# Altium PCB ALCT_MEZ_LX150T.PcbDoc (part 2 of 9)
Units mil, origin at the board's own origin, x right, y up, seen from the top; angles counter-clockwise.
Board outline 4101.98 x 5875.01 mil, 12 copper layers (Top Layer, Mid-Layer 1, +3V3, Mid-Layer 2, +1V2, Mid-Layer 4, +2V5, Mid-Layer 5, GND1, Mid-Layer 7, GND2, Bottom Layer), stack 64.7 mil thick; 378 components, 616 nets, 2492 pads, 1686 vias.
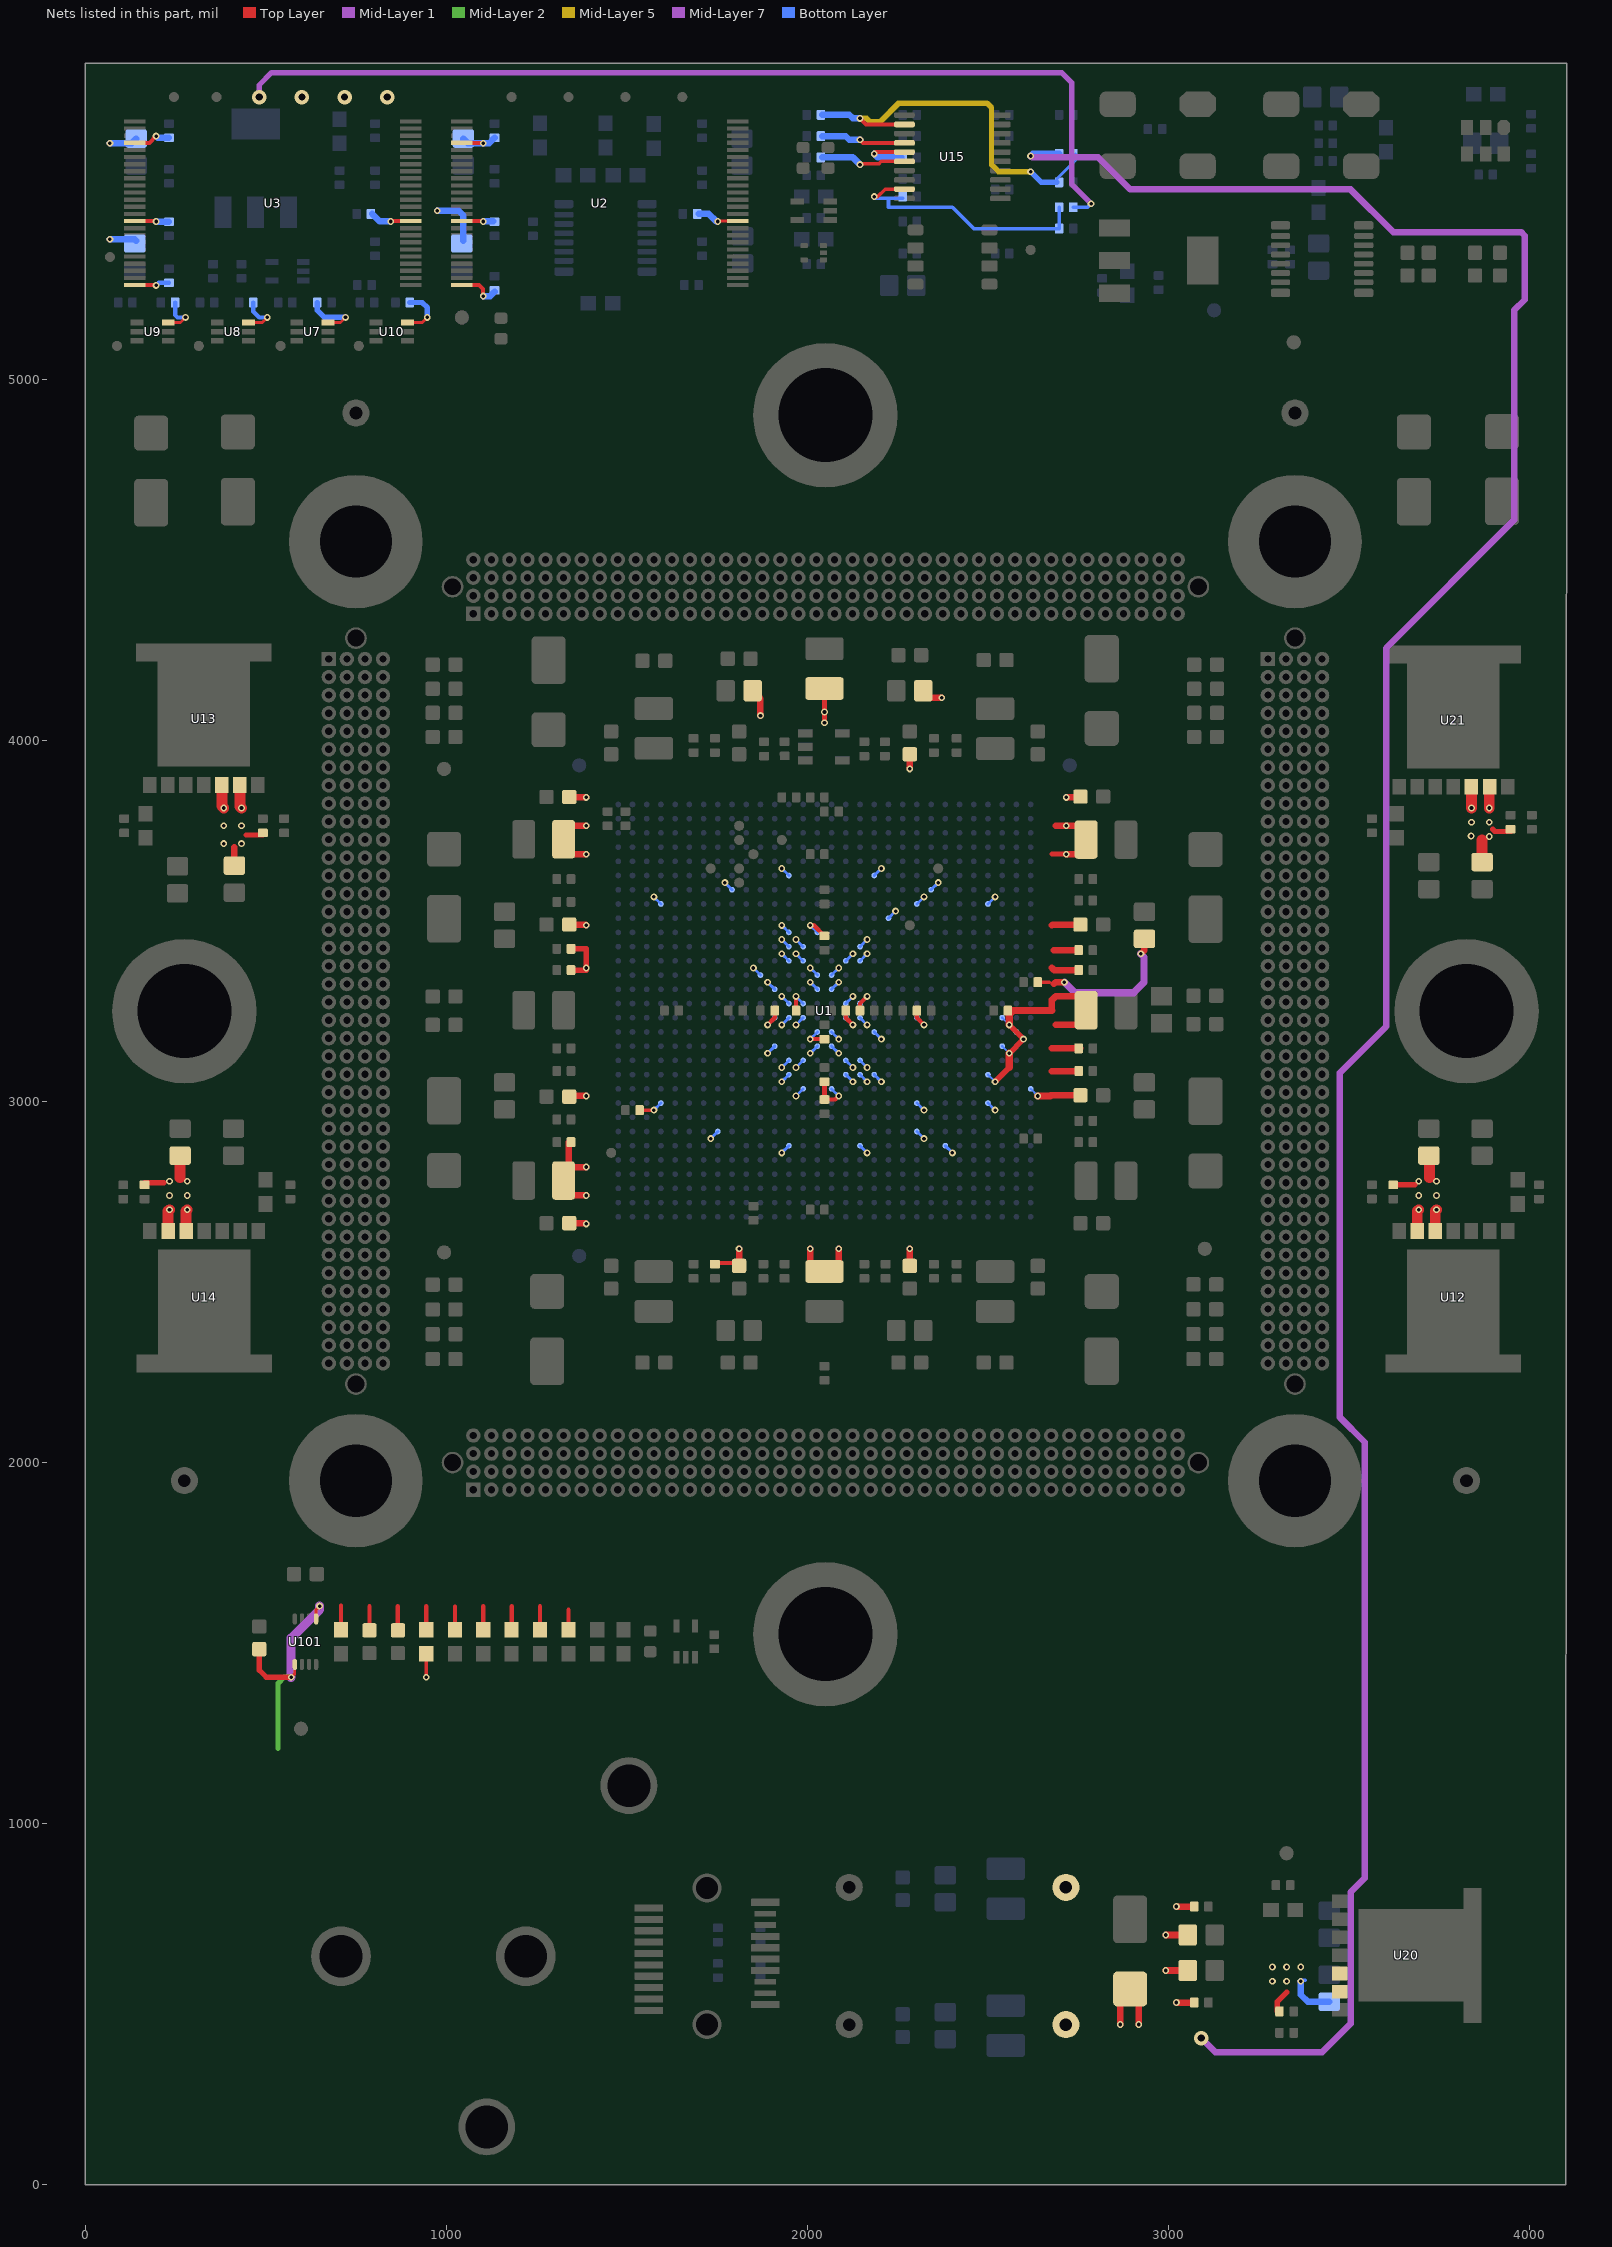
[diagram p12: the nets of this part, all layers, seen from the top]

## Footprints (in the part's own frame and the unit in brackets; to place one, negate y for a bottom-side part, rotate by r counter-clockwise, add the part's x,y. Pads: shape width x height; smd on the part's side, far side on the other; paste and mask are expansions set on the pad) (continued)
MC_S6/SM/SOT_553_DRL5 [mm] "http://www.ti.com/lit/ml/mpds158c/mpds158c.pdf"
  rrect25% 0.5x0.35 smd: 1(-0.675,0.5) 2(-0.675,0) 3(-0.675,-0.5) 4(0.675,-0.5) 5(0.675,0.5)
  Top Layer pour cut-out: 0.2,-0.9 1.1,-0.9 1.1,-0.1 0.2,-0.1
  Top Layer pour cut-out: 0.2,0 1.1,0 1.1,0.9 0.2,0.9
  Top Layer pour cut-out: -1.1,-0.9 0.2,-0.9 0.2,0.9 -1.1,0.9
  silkscreen extent -0.81,-0.75 0.18,1.31, body extent -0.77,-0.85 0.78,0.85, height 0.6
MC_S6/SM/SOT_SC70_DCK5 [mm]
  rect 0.9x0.4 smd: 1(-1.1,0.65) 2(-1.1,0) 3(-1.1,-0.65) 4(1.1,-0.65) 5(1.1,0.65)
  Top Layer pour cut-out: 0.4,-1.05 1.8,-1.05 1.8,-0.25 0.4,-0.25
  Top Layer pour cut-out: 0.4,0.25 1.8,0.25 1.8,1.05 0.4,1.05
  Top Layer pour cut-out: -1.8,-1.05 -0.4,-1.05 -0.4,1.05 -1.8,1.05
  silkscreen extent -1.46,-0.95 0.3,1.6
MC_S6/SM/SOT_SC70_DCK6 [mm]
  rect 0.9x0.4 smd: 1(-1.1,0.65) 2(-1.1,0) 3(-1.1,-0.65) 4(1.1,-0.65) 5(1.1,0) 6(1.1,0.65)
  Top Layer pour cut-out: -1.8,-1.05 -0.4,-1.05 -0.4,1.05 -1.8,1.05
  Top Layer pour cut-out: 0.4,-1.05 1.8,-1.05 1.8,1.05 0.4,1.05
  silkscreen extent -1.42,-0.95 0.3,1.57, body extent -1.05,-1 1.05,1, height 1
MC_S6/SM/SPAK7 [mm]
  rect 1.1x0.95 smd: 1(-4.71,3.81) 2(-4.71,2.54) 3(-4.71,1.27) 4(-4.71,0) 5(-4.71,-1.27) 6(-4.71,-2.54) 7(-4.71,-3.81)
  rect 8.03x6.5 smd paste-10.516: 8(0.6,0)
  rect 1.27x9.52 smd paste-10.516: 8(4.6,0)
  Top Layer pour cut-out: -5.51,-4.59 -3.81,-4.59 -3.81,4.51 -5.51,4.51
  silkscreen extent -5.42,4.81 -5,5.23, body extent -5.19,-4.76 5.27,4.76, height 1.96
MC_S6/SM/TE-1888247-1 [mm]
  rrect10% 2x0.5 smd: 1(-4.1,3.4) 2(-4.1,2.6) 3(-4.1,1.8) 4(-4.1,1) 5(-4.1,0.2) 6(-4.1,-0.6) 7(-4.1,-1.4) 8(-4.1,-2.2) 9(-4.1,-3) 10(-4.1,-3.8) 11(4.1,-3.4) 14(4.1,-1) 15(4.1,-0.2) 16(4.1,0.6) 17(4.1,1.4) 20(4.1,3.8)
  rrect10% 1.5x0.4 smd: 12(4.1,-2.6) 13(4.1,-1.8) 18(4.1,2.2) 19(4.1,3)
  round 2.032 hole 1.55: 21(0,-4.8) 21(0,4.8)
  Top Layer pour cut-out: -5.5,6 -5.5,-6 5.5,-6 5.5,6
  body extent -4.5,-5.5 4.5,5.5, height 5.35
MC_S6/SM/TSSOP16 [mm]
  rrect50% 1.35x0.6 smd: 1(-2.925,2.475) 8(-2.925,-2.275) 9(2.925,-2.275) 16(2.925,2.475)
  rrect50% 1.35x0.4 smd: 2(-2.925,1.725) 3(-2.925,1.075) 4(-2.925,0.425) 5(-2.925,-0.225) 6(-2.925,-0.875) 7(-2.925,-1.525) 10(2.925,-1.525) 11(2.925,-0.875) 12(2.925,-0.225) 13(2.925,0.425) 14(2.925,1.075) 15(2.925,1.725)
  Top Layer pour cut-out: -1.725,-2.925 -1.725,3.075 -4.025,3.075 -4.025,-2.925
  Top Layer pour cut-out: 3.975,-2.925 3.975,3.075 1.675,3.075 1.675,-2.925
  silkscreen extent -3.15,-2.43 1.68,3.5, body extent -3.2,-2.45 3.2,2.65, height 1.1
MC_S6/SM/VOG48 [mm]
  rect 1.5x0.3 smd: 1(-9.7,5.75) 2(-9.7,5.25) 3(-9.7,4.75) 4(-9.7,4.25) 5(-9.7,3.75) 6(-9.7,3.25) 7(-9.7,2.75) 8(-9.7,2.25) 9(-9.7,1.75) 10(-9.7,1.25) 11(-9.7,0.75) 12(-9.7,0.25) 13(-9.7,-0.25) 14(-9.7,-0.75) 15(-9.7,-1.25) 16(-9.7,-1.75) 17(-9.7,-2.25) 18(-9.7,-2.75) 19(-9.7,-3.25) 20(-9.7,-3.75) 21(-9.7,-4.25) 22(-9.7,-4.75) 23(-9.7,-5.25) 24(-9.7,-5.75) 25(9.7,-5.75) 26(9.7,-5.25) 27(9.7,-4.75) 28(9.7,-4.25) 29(9.7,-3.75) 30(9.7,-3.25) 31(9.7,-2.75) 32(9.7,-2.25) 33(9.7,-1.75) 34(9.7,-1.25) 35(9.7,-0.75) 36(9.7,-0.25) 37(9.7,0.25) 38(9.7,0.75) 39(9.7,1.25) 40(9.7,1.75) 41(9.7,2.25) 42(9.7,2.75) 43(9.7,3.25) 44(9.7,3.75) 45(9.7,4.25) 46(9.7,4.75) 47(9.7,5.25) 48(9.7,5.75)
  Top Layer pour cut-out: 10.8,-6.25 10.8,6.25 8.5,6.25 8.5,-6.25
  Top Layer pour cut-out: -8.5,-6.25 -8.5,6.25 -10.8,6.25 -10.8,-6.25
  silkscreen extent -9.92,-6 8.3,6.87, body extent -10,-6.05 10.1,6.05, height 1.26
MC_S6/SM/XTAL-7X5.08 [mm]
  oct 2.54x1.803 smd: 1(-2.75,-2.25)
  rrect50% 2.54x1.803 smd: 2(2.875,-2.25) 3(2.875,2.125) 4(-2.75,2.125)
  silkscreen extent -4.75,-3.75 3.85,2.83, body extent -3.5,-2.54 3.5,2.54, height 1.9
MC_S6/SM/XTAL-LVDS-3.2-2.5 [mm] "SMD Oscillator, 3.2x2.5 mm"
  oct 1.05x0.86 smd: 1(-0.925,1.29)
  rrect10% 1.05x0.82 smd: 2(-0.925,0.02) 5(0.925,0.02)
  rrect10% 1.05x0.86 smd: 3(-0.925,-1.29) 4(0.925,-1.29) 6(0.925,1.29)
  Top Layer pour cut-out: -1.8,-2.1 1.8,-2.1 1.8,2.2 -1.4,2.2 -1.8,1.8
  silkscreen extent -1.88,2.12 -1.62,2.38, body extent -1.25,-1.6 1.25,1.6, height 1.05
MC_S6/SPLATE [mil]
  silkscreen extent 550,582 3550,3407, body extent 0,0 4100,3950, height 188
MC_S6/TH/DELEVAN1537 [mil]
  round 75 hole 35: 1(-300,0) 2(300,0)
  silkscreen extent -240,-80 240,80, body extent -187,-77 188,78, height 156
MC_S6/TH/SAMTEC_MOLC_40X4 [mil]
  rect 32x32.01 / inner rect 32x32.01 / far side rect 40x40 hole 20: A1(0,0)
  oval 32x32.01 / inner oval 32x32.01 / far side round 40 hole 20: A2(50,0) A3(100,0) A4(150,0) A5(200,0) A6(250,0) A7(300,0) A8(350,0) A9(400,0) A10(450,0) A11(500,0) A12(550,0) A13(600,0) A14(650,0) A15(700,0) A16(750,0) A17(800,0) A18(850,0) A19(900,0) A20(950,0) A21(1000,0) A22(1050,0) A23(1100,0) A24(1150,0) A25(1200,0) A26(1250,0) A27(1300,0) A28(1350,0) A29(1400,0) A30(1450,0) A31(1500,0) A32(1550,0) A33(1600,0) A34(1650,0) A35(1700,0) A36(1750,0) A37(1800,0) A38(1850,0) A39(1900,0) A40(1950,0) B1(0,-50) B2(50,-50) B3(100,-50) B4(150,-50) B5(200,-50) B6(250,-50) B7(300,-50) B8(350,-50) B9(400,-50) B10(450,-50) B11(500,-50) B12(550,-50) B13(600,-50) B14(650,-50) B15(700,-50) B16(750,-50) B17(800,-50) B18(850,-50) B19(900,-50) B20(950,-50) B21(1000,-50) B22(1050,-50) B23(1100,-50) B24(1150,-50) B25(1200,-50) B26(1250,-50) B27(1300,-50) B28(1350,-50) B29(1400,-50) B30(1450,-50) B31(1500,-50) B32(1550,-50) B33(1600,-50) B34(1650,-50) B35(1700,-50) B36(1750,-50) B37(1800,-50) B38(1850,-50) B39(1900,-50) B40(1950,-50) C1(0,-100) C2(50,-100) C3(100,-100) C4(150,-100) C5(200,-100) C6(250,-100) C7(300,-100) C8(350,-100) C9(400,-100) C10(450,-100) C11(500,-100) C12(550,-100) C13(600,-100) C14(650,-100) C15(700,-100) C16(750,-100) C17(800,-100) C18(850,-100) C19(900,-100) C20(950,-100) C21(1000,-100) C22(1050,-100) C23(1100,-100) C24(1150,-100) C25(1200,-100) C26(1250,-100) C27(1300,-100) C28(1350,-100) C29(1400,-100) C30(1450,-100) C31(1500,-100) C32(1550,-100) C33(1600,-100) C34(1650,-100) C35(1700,-100) C36(1750,-100) C37(1800,-100) C38(1850,-100) C39(1900,-100) C40(1950,-100) D1(0,-150) D2(50,-150) D3(100,-150) D4(150,-150) D5(200,-150) D6(250,-150) D7(300,-150) D8(350,-150) D9(400,-150) D10(450,-150) D11(500,-150) D12(550,-150) D13(600,-150) D14(650,-150) D15(700,-150) D16(750,-150) D17(800,-150) D18(850,-150) D19(900,-150) D20(950,-150) D21(1000,-150) D22(1050,-150) D23(1100,-150) D24(1150,-150) D25(1200,-150) D26(1250,-150) D27(1300,-150) D28(1350,-150) D29(1400,-150) D30(1450,-150) D31(1500,-150) D32(1550,-150) D33(1600,-150) D34(1650,-150) D35(1700,-150) D36(1750,-150) D37(1800,-150) D38(1850,-150) D39(1900,-150) D40(1950,-150)
  round 60 hole 47: MC1(-57.5,-75) MC2(2007.5,-75)
  silkscreen extent -75,-235 2025,85, body extent -75,-234 2025,86, height 224
MC_S6/TH/SCREW_BASE [mil]
  round 400 / inner round 340 / far side round 340 hole 260: 1(0,0)
MC_S6/TH/SCREW_PLATE [mil]
  round 370 / inner round 280 / far side round 280 hole 200: 1(0,0)
MC_S6/TH/TIE_VIA [mil]
  round 20 on Mid7: 1(0,0) 2(0,50)
  Mid-Layer 7 region: -9.97,-10 10.03,-10 10.03,60 -9.97,60
MC_S6/TH/TPGND [mil]
  round 75 hole 35: 1(0,0)
  silkscreen extent -80,-85 80,45
MC_S6/TH/TPVIA [mil]
  round 28 smd paste-39.37: 1(0,0)
"PCBM_CERN_VTTX V2.1" [mm] "Versatile Twin Transmitter Module"
  round 4.2 hole 3: 1(-25.74,0) 2(-12.74,0)
  body extent -52.1,-7.25 1.8,7.25, height 11.71
SOT353-1 [mm] "SOT23, 5-Leads, Body 2.05x2.25mm, Pitch 0.65mm, IPC Medium Density"
  rect 0.95x0.4 smd: 1(-1.15,0.65) 2(-1.15,0) 3(-1.15,-0.65) 4(1.15,-0.65) 5(1.15,0.65)
  silkscreen extent -1.28,-1.15 0.3,1.52, body extent -0.67,-1.12 0.67,1.13, height 1.1
"VSSOP8 SOT765-1" [mm] "TSSOP, 8-Leads, Body 2.00x2.30mm, Pitch 0.50mm, IPC Medium Density"
  oval 0.8x0.3 smd: 1(-1.6,0.75) 2(-1.6,0.25) 3(-1.6,-0.25) 4(-1.6,-0.75) 5(1.6,-0.75) 6(1.6,-0.25) 7(1.6,0.25) 8(1.6,0.75)
  silkscreen extent -1.72,-1.05 0.8,1.57, body extent -1.55,-1.05 1.55,1.05, height 1

## Part data
1V2_INT 1V2_MGT 1V8 2V5_AUX 2V5_SFP 3V3 AWAKE BUSY CCLK CMPCSB CSB CSOB DONE DSN INIT INITB PROGB TCK TDI TDO TDOF TDOP TMS TTCCLK VCORE VREF WRITEB: library part TPVIA, Package=90, COMPGROUP=0, COMPROT=0, COMPSIDE=TOP, mfgr=Layout, mfgr_foot=TPVIA, mfgr_id=TPVIA
C1 C2 C9 C10 C88 C89 C107 C120 C121 C122 C123 C124 C125 C126 C127 C128 C129 C130 C131 C132 C134 C135 C136 C137 C138 C139 C140 C141 C142 C143 C144 C301 C311 C321 C331 C341 C351 C361 C362 C363 C364 C371 C372 C373 C374: library part GRM188R6YA475KE15D, "CAP CER 4.7UF 35V X5R 0603", Capacitance=4.7µF, Manufacturer=Murata, Operating Temperature="-55°C ~ 85°C", Package=0603, Package / Case="0603 (1608 Metric)", Standard Package=4,000, Supplier Part Number 1=490-7205-1-ND, Temperature Coefficient=X5R, Tolerance=±10%, Voltage - Rated=35V, Applications="General Purpose", Category=Capacitors, ComponentLink1Description=https://datasheet.ciiva.com/46444/1769893-46444984.pdf, ComponentLink1URL=https://datasheet.ciiva.com/46444/1769893-46444984.pdf, ComponentLink2Description=https://datasheet.ciiva.com/46444/1769893-46444985.pdf, ComponentLink2URL=https://datasheet.ciiva.com/46444/1769893-46444985.pdf, ComponentLink3Description=https://datasheet.ciiva.com/14906/partnumbering-e-01-14906426.pdf, ComponentLink3URL=https://datasheet.ciiva.com/14906/partnumbering-e-01-14906426.pdf, ComponentLink4Description=https://datasheet.ciiva.com/14906/partnumbering-e-01-14906427.pdf, ComponentLink4URL=https://datasheet.ciiva.com/14906/partnumbering-e-01-14906427.pdf, ComponentLink5Description=https://datasheet.ciiva.com/14906/partnumbering-e-01-14906428.pdf, ComponentLink5URL=https://datasheet.ciiva.com/14906/partnumbering-e-01-14906428.pdf, EDA / CAD Models="Download from Accelerated Designs", Family="Ceramic Capacitors", Featured Product="GA3 Safety Recognized Capacitors", Manufacturer Part Number=GRM188R6YA475KE15D, Mounting Type="Surface Mount, MLCC", Online Catalog="GRM Series", Other Names=490-7205-2, Packaging="Tape & Reel (TR)", Pricing 1="1=0.32, 10=0.264, 50=0.1486, 100=0.132, 250=0.099, 500=0.0875, 1000=0.0776 (USD)", Pricing 2="1=0.32, 10=0.264, 50=0.1486, 100=0.132, 250=0.099, 500=0.0875, 1000=0.0776 (USD)", Product Training Modules="High-Cap Multilayer Ceramic Capacitors", Series=GRM, Size / Dimension="0.063\" L x 0.031\" W (1.60mm x 0.80mm)", Stock 1=180441, Stock 2=180441, Supplier 1=Digikey, Supplier 2=Digikey, Supplier Part Number 2=490-7205-6-ND, Thickness (Max)="0.031\" (0.80mm)"
C3 C4 C6 C7 C11 C12 C14 C15 C17 C18 C29 C54 C58 C60 C65 C69 C71 C82 C90 C99 C100 C103 C110 C113 C146 C302 C312 C322 C332 C342 C365 C375: library part GRM21BR61E106KA73L, "CAP CER 10UF 25V X5R 0805", Capacitance=10µF, Manufacturer="Murata Electronics North America", Operating Temperature="-55°C ~ 85°C", Package=0805, Package / Case="0805 (2012 Metric)", Ratings=-, Supplier Part Number 1=490-5523-1-ND, Temperature Coefficient=X5R, Tolerance=±10%, Voltage - Rated=25V, Applications="General Purpose", Category=Capacitors, ComponentLink1Description=http://www.murata.com/~/media/webrenewal/support/library/catalog/products/capacitor/mlcc/c02e.pdf, ComponentLink1URL=http://www.murata.com/~/media/webrenewal/support/library/catalog/products/capacitor/mlcc/c02e.pdf, Features=-, Height - Seated (Max)=-, Lead Spacing=-, Lead Style=-, Manufacturer Part Number=GRM21BR61E106KA73L, Mounting Type="Surface Mount, MLCC", Packaging="Cut Tape (CT)", Part Status=Active, Pricing 1="1=0.19, 10=0.13, 50=0.0748, 100=0.0618, 250=0.052, 500=0.04356, 1000=0.03575 (USD)", RoHS="RoHS Compliant", Size / Dimension="0.079\" L x 0.049\" W (2.00mm x 1.25mm)", Stock 1=607428, Supplier 1=Digi-Key, Supplier 2=Digi-Key, Supplier Part Number 2=490-5523-6-ND, Thickness (Max)="0.053\" (1.35mm)"
C5 C8 C13 C16 C19 C26 C27 C84 C85 C106 C116 C133 C145 C148: library part C0402C103K4RACTU, "CAP CER 10nF 16V X7R 0402", Capacitance=10000pF, Manufacturer=KEMET, Operating Temperature="-55°C ~ 125°C", Package=0402, Package / Case="0402 (1005 Metric)", Ratings=-, Supplier Part Number 1=399-1038-1-ND, Temperature Coefficient=X7R, Tolerance=±10%, Voltage - Rated=16V, Applications="General Purpose", Category=Capacitors, ComponentLink1Description=http://www.kemet.com/docfinder?Partnumber=C0402C103K4RACTU, ComponentLink1URL=http://www.kemet.com/docfinder?Partnumber=C0402C103K4RACTU, Failure Rate=-, Features=-, Height - Seated (Max)=-, Lead Spacing=-, Lead Style=-, Manufacturer Part Number=C0402C103K4RACTU, Mounting Type="Surface Mount, MLCC", Packaging="Cut Tape (CT)", Part Status=Active, Pricing 1="1=0.1, 10=0.02, 25=0.0144, 50=0.0108, 100=0.0088, 250=0.00732, 500=0.00626, 1000=0.00492, 5000=0.00412 (USD)", Pricing 2="1=0.1, 10=0.02, 25=0.0144, 50=0.0108, 100=0.0088, 250=0.00732, 500=0.00626, 1000=0.00492, 5000=0.00412 (USD)", RoHS="RoHS Compliant", Size / Dimension="0.039\" L x 0.020\" W (1.00mm x 0.50mm)", Stock 1=605739, Stock 2=605739, Supplier 1=Digi-Key, Supplier 2=Digi-Key, Supplier Part Number 2=399-1038-6-ND, Thickness (Max)="0.022\" (0.55mm)"
C20 C21 C22 C23 C24 C25 C33 C40 C41 C42 C43 C44 C45 C46 C47 C78 C83 C101 C111 C119 C147 C201 C202 C203 C204 C205 C211 C212 C213 C214 C215 C221 C222 C223 C224 C225 C231 C232 C233 C234 C235 C241 C242 C243 C244 C251 C252 C253 C254 C261 C262 C263 C264 C265 C266 C267 C268 C271 C272 C273 C274 C275 C276: library part GRM155R61A474KE15J, "CAP CER 0.47UF 10V X5R 0402", Capacitance=0.47µF, Manufacturer="Murata Electronics North America", Operating Temperature="-55°C ~ 85°C", Package=0402, Package / Case="0402 (1005 Metric)", Ratings=-, Supplier Part Number 1=490-6305-1-ND, Temperature Coefficient=X5R, Tolerance=±10%, Voltage - Rated=10V, Applications="General Purpose", Category=Capacitors, ComponentLink1Description=http://www.murata.com/~/media/webrenewal/support/library/catalog/products/capacitor/mlcc/c02e.ashx, ComponentLink1URL=http://www.murata.com/~/media/webrenewal/support/library/catalog/products/capacitor/mlcc/c02e.ashx, Features=-, Height - Seated (Max)=-, Lead Spacing=-, Manufacturer Part Number=GRM155R61A474KE15J, Mounting Type="Surface Mount, MLCC", Packaging="Cut Tape (CT)", Part Status=Active, Pricing 1="1=0.1, 10=0.074, 100=0.0329, 500=0.02348, 1000=0.01845, 2500=0.01678, 5000=0.01543 (USD)", Pricing 2="1=0.1, 10=0.074, 100=0.0329, 500=0.02348, 1000=0.01845, 2500=0.01678, 5000=0.01543 (USD)", RoHS="RoHS Compliant", Size / Dimension="0.039\" L x 0.020\" W (1.00mm x 0.50mm)", Stock 1=35266, Stock 2=35286, Supplier 1=Digi-Key, Supplier 2=Digi-Key, Supplier Part Number 2=490-6305-6-ND, Thickness (Max)="0.022\" (0.55mm)"
C28 C30 C31 C32 C50 C51 C52 C53 C55 C56 C57 C59 C61 C62 C63 C64 C66 C67 C68 C70 C72 C73 C74 C75 C76 C77 C105 C109 C115: library part C0402C104K4RACTU, "CAP CER 0.1UF 16V X7R 0402", Capacitance=0.10µF, Manufacturer=KEMET, Operating Temperature="-55°C ~ 125°C", Package=0402, Package / Case="0402 (1005 Metric)", Ratings=-, Supplier Part Number 1=399-3521-1-ND, Temperature Coefficient=X7R, Tolerance=±10%, Voltage - Rated=16V, Applications="General Purpose", Category=Capacitors, ComponentLink1Description=http://www.kemet.com/docfinder?Partnumber=C0402C104K4RACTU, ComponentLink1URL=http://www.kemet.com/docfinder?Partnumber=C0402C104K4RACTU, Failure Rate=-, Features=-, Height - Seated (Max)=-, Lead Spacing=-, Lead Style=-, Manufacturer Part Number=C0402C104K4RACTU, Mounting Type="Surface Mount, MLCC", Packaging="Cut Tape (CT)", Part Status=Active, Pricing 1="1=0.11, 10=0.078, 25=0.0568, 50=0.0442, 100=0.0365, 250=0.03024, 500=0.02562, 1000=0.02121, 5000=0.01806 (USD)", Pricing 2="1=0.11, 10=0.078, 25=0.0568, 50=0.0442, 100=0.0365, 250=0.03024, 500=0.02562, 1000=0.02121, 5000=0.01806 (USD)", RoHS="RoHS Compliant", Size / Dimension="0.039\" L x 0.020\" W (1.00mm x 0.50mm)", Stock 1=3565698, Stock 2=3565998, Supplier 1=Digi-Key, Supplier 2=Digi-Key, Supplier Part Number 2=399-3521-6-ND, Thickness (Max)="0.022\" (0.55mm)"
C80 C81 C97 C98: library part C0603C103J3GACTU, "CAP CER 10000PF 50V NP0 0603", Capacitance=10000pF, Manufacturer=KEMET, Operating Temperature="-55°C ~ 125°C", Package=0603, Package / Case="0603 (1608 Metric)", Ratings=-, Supplier Part Number 1=399-7838-1-ND, Temperature Coefficient=NP0, Tolerance=±5%, Voltage - Rated=50V, Applications="General Purpose", Category=Capacitors, ComponentLink1Description=http://www.kemet.com/docfinder?Partnumber=C0603C103J3GACTU, ComponentLink1URL=http://www.kemet.com/docfinder?Partnumber=C0603C103J3GACTU, Failure Rate=-, Features="Low ESL", Height - Seated (Max)=-, Lead Spacing=-, Lead Style=-, Manufacturer Part Number=C0603C103J3GACTU, Mounting Type="Surface Mount, MLCC", Packaging="Cut Tape (CT)", Part Status=Active, Pricing 1="1=0.33, 10=0.231, 100=0.1385, 500=0.10388, 1000=0.08772 (USD)", Pricing 2="1=0.33, 10=0.231, 100=0.1385, 500=0.10388, 1000=0.08772 (USD)", RoHS="RoHS Compliant", Size / Dimension="0.063\" L x 0.031\" W (1.60mm x 0.80mm)", Stock 1=190820, Stock 2=190820, Supplier 1=Digi-Key, Supplier 2=Digi-Key, Supplier Part Number 2=399-7838-6-ND, Thickness (Max)="0.034\" (0.87mm)"
C86 C87 C102 C112 C401 C411 C421 C431 C441 C451 C461 C462 C471 C472: library part LMK325BJ107MM-T, "CAP CER 100UF 10V X5R 1210", Capacitance=100µF, Manufacturer="Taiyo Yuden", Operating Temperature="-55°C ~ 85°C", Package=1210, Package / Case="1210 (3225 Metric)", Ratings=-, Supplier Part Number 1=587-1965-1-ND, Temperature Coefficient=X5R, Tolerance=±20%, Voltage - Rated=10V, Applications="General Purpose", Category=Capacitors, ComponentLink1Description=http://www.yuden.co.jp/productdata/catalog/en/mlcc_all_e.pdf, ComponentLink1URL=http://www.yuden.co.jp/productdata/catalog/en/mlcc_all_e.pdf, Features=-, Height - Seated (Max)=-, Lead Spacing=-, Lead Style=-, Manufacturer Part Number=LMK325BJ107MM-T, Mounting Type="Surface Mount, MLCC", Packaging="Cut Tape (CT)", Part Status=Active, Pricing 1="1=1.15, 10=0.909, 25=0.8332, 50=0.7878, 100=0.6818, 250=0.60608 (USD)", Pricing 2="1=1.16, 10=0.914, 25=0.8376, 50=0.792, 100=0.6855, 250=0.60932 (USD)", RoHS="RoHS Compliant", Size / Dimension="0.126\" L x 0.098\" W (3.20mm x 2.50mm)", Stock 1=345948, Stock 2=345948, Supplier 1=Digi-Key, Supplier 2=Digi-Key, Supplier Part Number 2=587-1965-6-ND, Thickness (Max)="0.106\" (2.70mm)"
C91 C92 C93 C94 C95 C96: library part GRM155R71C224KA12D, "CAP CER 0.22UF 15V X7R 0402", Capacitance=0.22µF, Manufacturer="Murata Electronics North America", Operating Temperature="-55°C ~ 125°C", Package=0402, Package / Case="0402 (1005 Metric)", Ratings=-, Supplier Part Number 1=490-5418-1-ND, Temperature Coefficient=X7R, Tolerance=±10%, Voltage - Rated=25V, Applications="General Purpose", Category=Capacitors, ComponentLink1Description=http://www.murata.com/~/media/webrenewal/support/library/catalog/products/capacitor/mlcc/c02e.ashx, ComponentLink1URL=http://www.murata.com/~/media/webrenewal/support/library/catalog/products/capacitor/mlcc/c02e.ashx, Features=-, Height - Seated (Max)=-, Lead Spacing=-, Lead Style=-, Manufacturer Part Number=GRM155R71C224KA12D, Mounting Type="Surface Mount, MLCC", Packaging="Cut Tape (CT)", Part Status=Active, Pricing 1="1=0.1, 10=0.063, 100=0.0279, 500=0.0199, 1000=0.01564, 2500=0.01422, 5000=0.01308 (USD)", Pricing 2="1=0.1, 10=0.063, 100=0.0279, 500=0.0199, 1000=0.01564, 2500=0.01422, 5000=0.01308 (USD)", RoHS="RoHS Compliant", Size / Dimension="0.039\" L x 0.020\" W (1.00mm x 0.50mm)", Stock 1=1853641, Stock 2=1854141, Supplier 1=Digi-Key, Supplier 2=Digi-Key, Supplier Part Number 2=490-5418-6-ND, Thickness (Max)="0.022\" (0.55mm)"
C104 C108 C114 C117 C118: library part GRM188R71E474KA12D, "CAP CER 0.47UF 25V X7R 0603", Capacitance=0.47µF, Manufacturer=Murata, Operating Temperature="-55°C ~ 125°C", Package=0603, Package / Case="0603 (1608 Metric)", Ratings=-, Standard Package=4,000, Supplier Part Number 1=490-3291-1-ND, Temperature Coefficient=X7R, Tolerance=±10%, Voltage - Rated=25V, Applications="General Purpose", Category=Capacitors, ComponentLink1Description=https://datasheet.ciiva.com/16293/grm188r71e474ka12d-16293088.pdf, ComponentLink1URL=https://datasheet.ciiva.com/16293/grm188r71e474ka12d-16293088.pdf, ComponentLink2Description=https://datasheet.ciiva.com/7937/1747458-7937650.pdf, ComponentLink2URL=https://datasheet.ciiva.com/7937/1747458-7937650.pdf, ComponentLink3Description=https://datasheet.ciiva.com/134/grm188r71e474ka12-01-134308.pdf, ComponentLink3URL=https://datasheet.ciiva.com/134/grm188r71e474ka12-01-134308.pdf, ComponentLink4Description=https://datasheet.ciiva.com/134/grm188r71e474ka12-01-134309.pdf, ComponentLink4URL=https://datasheet.ciiva.com/134/grm188r71e474ka12-01-134309.pdf, ComponentLink5Description=https://datasheet.ciiva.com/134/grm188r71e474ka12-01-134310.pdf, ComponentLink5URL=https://datasheet.ciiva.com/134/grm188r71e474ka12-01-134310.pdf, ComponentLink6Description=https://datasheet.ciiva.com/22703/1747458-22703340.pdf, ComponentLink6URL=https://datasheet.ciiva.com/22703/1747458-22703340.pdf, ComponentLink7Description=https://datasheet.ciiva.com/29199/454518-da-01-en-vs-kondensator-0603-29199596.pdf, ComponentLink7URL=https://datasheet.ciiva.com/29199/454518-da-01-en-vs-kondensator-0603-29199596.pdf, ComponentLink8Description=https://datasheet.ciiva.com/34302/1857559-34302862.pdf, ComponentLink8URL=https://datasheet.ciiva.com/34302/1857559-34302862.pdf, Family="Ceramic Capacitors", Featured Product="GA3 Safety Recognized Caps and Hi-Cap MLCC", Features=-, Height - Seated (Max)=-, Lead Spacing=-, Lead Style=-, Manufacturer Part Number=GRM188R71E474KA12D, Mounting Type="Surface Mount, MLCC", Online Catalog="GRM Series", Other Names=490-3291-2, Packaging="Tape & Reel (TR)", Pricing 1="1=0.17, 10=0.114, 50=0.0656, 100=0.0542, 250=0.0456, 500=0.0382, 1000=0.0314 (USD)", Pricing 2="1=0.17, 10=0.114, 50=0.0656, 100=0.0542, 250=0.0456, 500=0.0382, 1000=0.0314 (USD)", Product Training Modules="High-Cap Multilayer Ceramic Capacitors", Series=GRM, Size / Dimension="0.063\" L x 0.031\" W (1.60mm x 0.80mm)", Stock 1=616139, Stock 2=616139, Supplier 1=Digikey, Supplier 2=Digikey, Supplier Part Number 2=490-3291-6-ND, Thickness (Max)="0.035\" (0.90mm)"
CT1 CT2 CT3 CT4 CT5 CT6 CT7 CT8 CT9 CT10 CT11 CT12 CT13: library part T491D227K016AT, "CAP TANT 220UF 16V 10% 2917", Capacitance=220µF, ESR (Equivalent Series Resistance)="500 mOhm", Lifetime @ Temp.="2000 Hrs @ 85°C", Manufacturer=KEMET, Manufacturer Size Code=D, Operating Temperature="-55°C ~ 125°C", Package=2917, Package / Case="2917 (7343 Metric)", Supplier Part Number 1=399-10429-1-ND, Tolerance=±10%, Voltage - Rated=16V, Category=Capacitors, ComponentLink1Description=http://www.kemet.com/Lists/ProductCatalog/Attachments/254/KEM_T2005_T491.pdf, ComponentLink1URL=http://www.kemet.com/Lists/ProductCatalog/Attachments/254/KEM_T2005_T491.pdf, Failure Rate=-, Features="General Purpose", Height - Seated (Max)="0.122\" (3.10mm)", Lead Spacing=-, Manufacturer Part Number=T491D227K016AT, Mounting Type="Surface Mount", Packaging="Cut Tape (CT)", Part Status=Active, Pricing 1="1=1.28, 10=1.009, 25=0.9248, 50=0.8744, 100=0.7568, 250=0.67268 (USD)", Pricing 2="1=1.28, 10=1.009, 25=0.9248, 50=0.8744, 100=0.7568, 250=0.67268 (USD)", RoHS="RoHS Compliant", Size / Dimension="0.287\" L x 0.169\" W (7.30mm x 4.30mm)", Stock 1=48724, Stock 2=48724, Supplier 1=Digi-Key, Supplier 2=Digi-Key, Supplier Part Number 2=399-10429-6-ND, Type=Molded
D1: "LED BLUE CLEAR 0603 SMD", Color=Blue, Current - Test=5mA, Lens Color=Colorless, Manufacturer="Lite-On Inc.", Millicandela Rating=15mcd, Package / Case="0603 (1608 Metric)", Supplier Device Package="Chip LED", Supplier Part Number 1=160-1827-1-ND, Voltage - Forward (Vf) (Typ)=2.8V, Category=Optoelectronics, ComponentLink1Description=http://optoelectronics.liteon.com/upload/download/DS22-2004-060/P_100_LTST-C193TBKT-5A.pdf, ComponentLink1URL=http://optoelectronics.liteon.com/upload/download/DS22-2004-060/P_100_LTST-C193TBKT-5A.pdf, ComponentLink2Description=http://media.digikey.com/pdf/Data%20Sheets/Lite-On%20PDFs/LTST-C193TBKT-5A.pdf, ComponentLink2URL=http://media.digikey.com/pdf/Data%20Sheets/Lite-On%20PDFs/LTST-C193TBKT-5A.pdf, Features=-, Height (Max)=0.35mm, Lens Style/Size="Rectangle with Flat Top, 1.15mm x 0.80mm", Lens Transparency=Clear, Manufacturer Part Number=LTST-C193TBKT-5A, Mounting Type="Surface Mount", Packaging="Cut Tape (CT)", Part Status=Active, Pricing 1="1=0.47, 10=0.336, 25=0.2572, 100=0.1678, 250=0.12304, 500=0.10442, 1000=0.08577 (USD)", Pricing 2="1=0.47, 10=0.336, 25=0.2572, 100=0.1678, 250=0.12304, 500=0.10442, 1000=0.08577 (USD)", RoHS="RoHS Compliant", Size / Dimension="1.60mm L x 0.80mm W", Stock 1=380419, Stock 2=380419, Supplier 1=Digi-Key, Supplier 2=Digi-Key, Supplier Part Number 2=160-1827-6-ND, Viewing Angle=130°, Wavelength - Dominant=470nm, Wavelength - Peak=468nm
D2: "LED GREEN CLEAR 0603 SMD", Color=Green, Current - Test=5mA, Lens Color=Colorless, Manufacturer="Lite-On Inc.", Millicandela Rating=16.25mcd, Package / Case="0603 (1608 Metric)", Supplier Device Package="Chip LED", Supplier Part Number 1=160-1828-1-ND, Voltage - Forward (Vf) (Typ)=2V, Category=Optoelectronics, ComponentLink1Description=http://optoelectronics.liteon.com/upload/download/DS22-2007-0094/LTST-C193KGKT-5A.PDF, ComponentLink1URL=http://optoelectronics.liteon.com/upload/download/DS22-2007-0094/LTST-C193KGKT-5A.PDF, Features=-, Height (Max)=0.45mm, Lens Style/Size="Rectangle with Flat Top, 1.15mm x 0.80mm", Lens Transparency=Clear, Manufacturer Part Number=LTST-C193KGKT-5A, Mounting Type="Surface Mount", Packaging="Cut Tape (CT)", Part Status=Active, Pricing 1="1=0.41, 10=0.296, 25=0.2268, 100=0.148, 250=0.10852, 500=0.0921, 1000=0.07565, 2500=0.06578 (USD)", Pricing 2="1=0.41, 10=0.296, 25=0.2268, 100=0.148, 250=0.10852, 500=0.0921, 1000=0.07565, 2500=0.06578 (USD)", RoHS="RoHS Compliant", Size / Dimension="1.60mm L x 0.80mm W", Stock 1=83440, Stock 2=83440, Supplier 1=Digi-Key, Supplier 2=Digi-Key, Supplier Part Number 2=160-1828-6-ND, Viewing Angle=130°, Wavelength - Dominant=572nm, Wavelength - Peak=574nm
D40 D41: "LED RED CLEAR 0603 SMD", Color=Red, Current - Test=5mA, Lens Color=Colorless, Manufacturer="Lite-On Inc.", Millicandela Rating=26.05mcd, Package / Case="0603 (1608 Metric)", Supplier Device Package="Chip LED", Supplier Part Number 1=160-1830-1-ND, Voltage - Forward (Vf) (Typ)=2V, Category=Optoelectronics, ComponentLink1Description=http://optoelectronics.liteon.com/upload/download/DS22-2005-077/LTST-C193KRKT-5A.PDF, ComponentLink1URL=http://optoelectronics.liteon.com/upload/download/DS22-2005-077/LTST-C193KRKT-5A.PDF, Features=-, Height (Max)=0.45mm, Lens Style/Size="Rectangle with Flat Top, 1.15mm x 0.80mm", Lens Transparency=Clear, Manufacturer Part Number=LTST-C193KRKT-5A, Mounting Type="Surface Mount", Packaging="Cut Tape (CT)", Part Status=Active, Pricing 1="1=0.41, 10=0.296, 25=0.2268, 100=0.148, 250=0.10852, 500=0.0921, 1000=0.07565, 2500=0.06578 (USD)", Pricing 2="1=0.41, 10=0.296, 25=0.2268, 100=0.148, 250=0.10852, 500=0.0921, 1000=0.07565, 2500=0.06578 (USD)", RoHS="RoHS Compliant", Size / Dimension="1.60mm L x 0.80mm W", Stock 1=97257, Stock 2=97257, Supplier 1=Digi-Key, Supplier 2=Digi-Key, Supplier Part Number 2=160-1830-6-ND, Viewing Angle=130°, Wavelength - Dominant=631nm, Wavelength - Peak=639nm
H1 H2 H3 H4: library part MezScrew, COMPGROUP=0, COMPROT=0, COMPSIDE=TOP, mfgr=McMaster, mfgr_foot="6-32 ButtonSkt", mfgr_id=92949A146
J1: "CONN FP+ CAGE 30AU SMD", Manufacturer="TE Connectivity AMP Connectors", Manufacturer Part Number=1888247-1, Supplier Part Number 1=A97943CT-ND, Category="Connectors, Interconnects", ComponentLink1Description=http://www.te.com/commerce/DocumentDelivery/DDEController?Action=srchrtrv&DocNm=1888247&DocType=Customer+Drawing&DocLang=English, ComponentLink1URL=http://www.te.com/commerce/DocumentDelivery/DDEController?Action=srchrtrv&DocNm=1888247&DocType=Customer+Drawing&DocLang=English, Connector Style=Receptacle, Connector Type=SFP+, Contact Finish=Gold, Contact Finish Thickness="30µin (0.76µm)", Features="Board Guide", Mounting Type="Surface Mount, Right Angle", Number of Positions=20, Packaging="Cut Tape (CT)", Part Status=Active, Pricing 1="1=2.44, 10=2.21, 50=1.9844, 100=1.8942 (USD)", Pricing 2="1=2.44, 10=2.21, 50=1.9844, 100=1.8942 (USD)", RoHS="RoHS Compliant", Stock 1=23324, Stock 2=23324, Supplier 1=Digi-Key, Supplier 2=Digi-Key, Supplier Part Number 2=A97943DKR-ND, Termination=Solder
L3 L4: library part 1537-12K, "IND, Air Core, 1uH, 880mA, TH", Current - Saturation=-, Current Rating=880mA, DC Resistance (DCR)="290 mOhm Max", Frequency - Self Resonant=200MHz, Inductance=1µH, Manufacturer="API Delevan Inc.", Operating Temperature="-55°C ~ 125°C", Package / Case=Axial, Q @ Freq="50 @ 25MHz", Supplier Part Number 1=1134-1088-1-ND, Tolerance=±10%, Category="Inductors, Coils, Chokes", ComponentLink1Description=http://www.delevan.com/seriesPDFs/1537.pdf, ComponentLink1URL=http://www.delevan.com/seriesPDFs/1537.pdf, Height - Seated (Max)=-, Manufacturer Part Number=1537-12K, Material - Core=Phenolic, mfgr_id=1537-12K, Mounting Type="Through Hole", Notification="QPL or Military Specs are for reference only. Parts are not for military use. C of C not provided. See Terms and Conditions.", Packaging="Cut Tape (CT)", Part Status=Active, Pricing 1="1=1.07, 10=0.997, 25=0.9208, 50=0.7672, 100=0.7212, 250=0.64444, 500=0.55238 (USD)", Pricing 2="1000=0.44, 3000=0.42625, 5000=0.4125, 10000=0.39875, 25000=0.385 (USD)", Ratings=-, RoHS="RoHS non-compliant", Shielding=Unshielded, Size / Dimension="0.156\" Dia x 0.375\" L (3.96mm x 9.53mm)", Stock 1=1779, Stock 2=1000, Supplier 1=Digi-Key, Supplier 2=Digi-Key, Supplier Device Package=Axial, Supplier Part Number 2=1134-1088-2-ND, Type=-
M1: "Heatsink 17 x 17 x 9.5mm"
PCBM1: "Versatile Twin Transmitter Module", Manufacturer=CERN, Manufacturer Part Number=VTTX-V2.1, Part Number="PCBM_CERN_VTTX V2.1_a", Author="CERN DEM JLC", Bonding=No, ComponentHeight=16.5mm, Component Type=Standard, CreateDate=13/01/2014, Device=VTTX-V2.1, HelpURL="\\cern.ch\dfs\Applications\Altium\Datasheets\PCBM_CERN_VTTX V2.1.pdf", LatestRevisionDate=13/01/2014, Mounted=Yes, PackageDescription="Versatile Twin Transmitter Module", Part Description="Versatile Twin Transmitter Module", Pin Count=0, PressFit=No, Sense=No, SMD=No, Socket=No
R1 R15: library part ERA-2AEB122X, "RES SMD 1.2K OHM 0.1% 1/16W 0402", Manufacturer="Panasonic Electronic Components", Operating Temperature="-55°C ~ 155°C", Package=0402, Package / Case="0402 (1005 Metric)", Power (Watts)="0.063W, 1/16W", Supplier Part Number 1=P1.2KDCCT-ND, Temperature Coefficient=±25ppm/°C, Tolerance=±0.1%, Category=Resistors, ComponentLink1Description=https://industrial.panasonic.com/cdbs/www-data/pdf/RDM0000/AOA0000C307.pdf, ComponentLink1URL=https://industrial.panasonic.com/cdbs/www-data/pdf/RDM0000/AOA0000C307.pdf, Composition="Thin Film", Failure Rate=-, Features="Automotive AEC-Q200", Height - Seated (Max)="0.016\" (0.40mm)", Manufacturer Part Number=ERA-2AEB122X, Packaging="Cut Tape (CT)", Part Status=Active, Pricing 1="1=0.45, 10=0.321, 100=0.1283, 1000=0.06322, 2500=0.05858, 5000=0.053 (USD)", Pricing 2="1=0.45, 10=0.321, 100=0.1283, 1000=0.06322, 2500=0.05858, 5000=0.053 (USD)", RoHS="RoHS Compliant", Size / Dimension="0.039\" L x 0.020\" W (1.00mm x 0.50mm)", Stock 1=25790, Stock 2=25790, Supplier 1=Digi-Key, Supplier 2=Digi-Key, Supplier Device Package=0402, Supplier Part Number 2=P1.2KDCDKR-ND
R2 R5 R8 R11 R16 R40 R55 R81 R82 R83 R101 R103 R104 R105 R106 R108: library part CR0603-FX-4701ELF, "RES SMD 4.7K OHM 1% 1/10W 0603", Manufacturer="Bourns Inc.", Operating Temperature="-55°C ~ 155°C", Package / Case="0603 (1608 Metric)", Power (Watts)="0.1W, 1/10W", Supplier Device Package=0603, Supplier Part Number 1=CR0603-FX-4701ELFCT-ND, Temperature Coefficient=±100ppm/°C, Tolerance=±1%, Category=Resistors, ComponentLink1Description=http://www.bourns.com/docs/Product-Datasheets/CHPREZTR.pdf, ComponentLink1URL=http://www.bourns.com/docs/Product-Datasheets/CHPREZTR.pdf, Composition="Thick Film", Failure Rate=-, Features="Moisture Resistant", Height - Seated (Max)="0.022\" (0.55mm)", Manufacturer Part Number=CR0603-FX-4701ELF, Packaging="Cut Tape (CT)", Part Status=Active, Pricing 1="1=0.1, 10=0.021, 100=0.0086, 1000=0.00385, 2500=0.00334 (USD)", Pricing 2="1=0.1, 10=0.021, 100=0.0086, 1000=0.00385, 2500=0.00334 (USD)", Resistance (Ohms)=4.7k, RoHS="RoHS Compliant", Size / Dimension="0.063\" L x 0.031\" W (1.60mm x 0.80mm)", Stock 1=43560, Stock 2=43560, Supplier 1=Digi-Key, Supplier 2=Digi-Key, Supplier Part Number 2=CR0603-FX-4701ELFDKR-ND
R3 R17: library part ERA-2AEB301X, "RES SMD 300 OHM 0.1% 1/16W 0402", Manufacturer="Panasonic Electronic Components", Operating Temperature="-55°C ~ 155°C", Package=0402, Package / Case="0402 (1005 Metric)", Power (Watts)="0.063W, 1/16W", Supplier Part Number 1=P300DCCT-ND, Temperature Coefficient=±25ppm/°C, Tolerance=±0.1%, Category=Resistors, ComponentLink1Description=https://industrial.panasonic.com/cdbs/www-data/pdf/RDM0000/AOA0000C307.pdf, ComponentLink1URL=https://industrial.panasonic.com/cdbs/www-data/pdf/RDM0000/AOA0000C307.pdf, Composition="Thin Film", Failure Rate=-, Features="Automotive AEC-Q200", Height - Seated (Max)="0.016\" (0.40mm)", Manufacturer Part Number=ERA-2AEB301X, Packaging="Cut Tape (CT)", Part Status=Active, Pricing 1="1=0.45, 10=0.321, 100=0.1283, 1000=0.06322, 2500=0.05858, 5000=0.053 (USD)", Pricing 2="1=0.45, 10=0.321, 100=0.1283, 1000=0.06322, 2500=0.05858, 5000=0.053 (USD)", RoHS="RoHS Compliant", Size / Dimension="0.039\" L x 0.020\" W (1.00mm x 0.50mm)", Stock 1=31760, Stock 2=31760, Supplier 1=Digi-Key, Supplier 2=Digi-Key, Supplier Device Package=0402, Supplier Part Number 2=P300DCDKR-ND
R4 R21 R23 R27 R28: library part ERA-2AEB512X, "RES SMD 5.1K OHM 0.1% 1/16W 0402", Manufacturer="Panasonic Electronic Components", Operating Temperature="-55°C ~ 155°C", Package / Case="0402 (1005 Metric)", Power (Watts)="0.063W, 1/16W", Supplier Device Package=0402, Supplier Part Number 1=P5.1KDCCT-ND, Temperature Coefficient=±25ppm/°C, Tolerance=±0.1%, Category=Resistors, ComponentLink1Description=https://industrial.panasonic.com/cdbs/www-data/pdf/RDA0000/AOA0000C237.pdf, ComponentLink1URL=https://industrial.panasonic.com/cdbs/www-data/pdf/RDA0000/AOA0000C237.pdf, Composition="Thin Film", Failure Rate=-, Features="Automotive AEC-Q200", Height - Seated (Max)="0.016\" (0.40mm)", Manufacturer Part Number=ERA-2AEB512X, Number of Terminations=2, Packaging="Cut Tape (CT)", Part Status=Active, Pricing 1="1=0.61, 50=0.238, 100=0.1913, 250=0.14876, 500=0.1122, 1000=0.0867, 5000=0.0646 (USD)", Pricing 2="1=0.61, 50=0.238, 100=0.1913, 250=0.14876, 500=0.1122, 1000=0.0867, 5000=0.0646 (USD)", Resistance (Ohms)=5.1k, RoHS="RoHS Compliant", Size / Dimension="0.039\" L x 0.020\" W (1.00mm x 0.50mm)", Stock 1=26098, Stock 2=26098, Supplier 1=Digi-Key, Supplier 2=Digi-Key, Supplier Part Number 2=P5.1KDCDKR-ND
R6: library part ERA-2AEB1961X, "RES SMD 1.96K OHM 0.1% 1/16W 0402", Manufacturer="Panasonic Electronic Components", Operating Temperature="-55°C ~ 155°C", Package=0402, Package / Case="0402 (1005 Metric)", Power (Watts)="0.063W, 1/16W", Supplier Part Number 1=P1.96KDCCT-ND, Temperature Coefficient=±25ppm/°C, Tolerance=±0.1%, Category=Resistors, ComponentLink1Description=https://industrial.panasonic.com/cdbs/www-data/pdf/RDM0000/AOA0000C307.pdf, ComponentLink1URL=https://industrial.panasonic.com/cdbs/www-data/pdf/RDM0000/AOA0000C307.pdf, Composition="Thin Film", Failure Rate=-, Features="Automotive AEC-Q200", Height - Seated (Max)="0.016\" (0.40mm)", Manufacturer Part Number=ERA-2AEB1961X, Packaging="Cut Tape (CT)", Part Status=Active, Pricing 1="1=0.45, 10=0.321, 100=0.1283, 1000=0.06322, 2500=0.05858, 5000=0.053 (USD)", Pricing 2="1=0.45, 10=0.321, 100=0.1283, 1000=0.06322, 2500=0.05858, 5000=0.053 (USD)", RoHS="RoHS Compliant", Size / Dimension="0.039\" L x 0.020\" W (1.00mm x 0.50mm)", Stock 1=36796, Stock 2=36796, Supplier 1=Digi-Key, Supplier 2=Digi-Key, Supplier Device Package=0402, Supplier Part Number 2=P1.96KDCDKR-ND
R7: library part ERA-2AEB182X, "RES SMD 1.8k OHM 0.1% 1/16W 0402", Manufacturer="Panasonic Electronic Components", Operating Temperature="-55°C ~ 155°C", Package=0402, Package / Case="0402 (1005 Metric)", Power (Watts)="0.063W, 1/16W", Supplier Part Number 1=P1.8KDCCT-ND, Temperature Coefficient=±25ppm/°C, Tolerance=±0.1%, Category=Resistors, ComponentLink1Description=https://industrial.panasonic.com/cdbs/www-data/pdf/RDM0000/AOA0000C307.pdf, ComponentLink1URL=https://industrial.panasonic.com/cdbs/www-data/pdf/RDM0000/AOA0000C307.pdf, Composition="Thin Film", Failure Rate=-, Features="Automotive AEC-Q200", Height - Seated (Max)="0.016\" (0.40mm)", Manufacturer Part Number=ERA-2AEB182X, Packaging="Cut Tape (CT)", Part Status=Active, Pricing 1="1=0.45, 10=0.321, 100=0.1283, 1000=0.06322, 2500=0.05858, 5000=0.053 (USD)", Pricing 2="1=0.45, 10=0.321, 100=0.1283, 1000=0.06322, 2500=0.05858, 5000=0.053 (USD)", RoHS="RoHS Compliant", Size / Dimension="0.039\" L x 0.020\" W (1.00mm x 0.50mm)", Stock 1=43633, Stock 2=43633, Supplier 1=Digi-Key, Supplier 2=Digi-Key, Supplier Device Package=0402, Supplier Part Number 2=P1.8KDCDKR-ND
R9 R12: library part ERA-2AEB132X, "RES SMD 1.3k OHM 0.1% 1/16W 0402", Manufacturer="Panasonic Electronic Components", Operating Temperature="-55°C ~ 155°C", Package / Case="0402 (1005 Metric)", Power (Watts)="0.063W, 1/16W", Supplier Device Package=0402, Supplier Part Number 1=P1.3KDCCT-ND, Temperature Coefficient=±25ppm/°C, Tolerance=±0.1%, Category=Resistors, ComponentLink1Description=https://industrial.panasonic.com/cdbs/www-data/pdf/RDM0000/AOA0000C307.pdf, ComponentLink1URL=https://industrial.panasonic.com/cdbs/www-data/pdf/RDM0000/AOA0000C307.pdf, Composition="Thin Film", Failure Rate=-, Features="Automotive AEC-Q200", Height - Seated (Max)="0.016\" (0.40mm)", Manufacturer Part Number=ERA-2AEB132X, Packaging="Cut Tape (CT)", Part Status=Active, Pricing 1="1=0.45, 10=0.321, 100=0.1283, 1000=0.06322, 2500=0.05858, 5000=0.053 (USD)", Pricing 2="1=0.45, 10=0.321, 100=0.1283, 1000=0.06322, 2500=0.05858, 5000=0.053 (USD)", RoHS="RoHS Compliant", Size / Dimension="0.039\" L x 0.020\" W (1.00mm x 0.50mm)", Stock 1=249, Stock 2=249, Supplier 1=Digi-Key, Supplier 2=Digi-Key, Supplier Part Number 2=P1.3KDCDKR-ND
R10: library part ERA-2AEB182X, "RES SMD 1.8k OHM 0.1% 1/16W 0402", Manufacturer="Panasonic Electronic Components", Operating Temperature="-55°C ~ 155°C", Package / Case="0402 (1005 Metric)", Power (Watts)="0.063W, 1/16W", Supplier Device Package=0402, Supplier Part Number 1=P1.8KDCCT-ND, Temperature Coefficient=±25ppm/°C, Tolerance=±0.1%, Category=Resistors, ComponentLink1Description=https://industrial.panasonic.com/cdbs/www-data/pdf/RDA0000/AOA0000C237.pdf, ComponentLink1URL=https://industrial.panasonic.com/cdbs/www-data/pdf/RDA0000/AOA0000C237.pdf, Composition="Thin Film", Failure Rate=-, Features="Automotive AEC-Q200", Height - Seated (Max)="0.016\" (0.40mm)", Manufacturer Part Number=ERA-2AEB182X, Number of Terminations=2, Packaging="Cut Tape (CT)", Part Status=Active, Pricing 1="1=0.6, 50=0.2484, 100=0.2052, 250=0.162, 500=0.13824, 1000=0.10368, 5000=0.07776 (USD)", Pricing 2="1=0.6, 50=0.2484, 100=0.2052, 250=0.162, 500=0.13824, 1000=0.10368, 5000=0.07776 (USD)", Resistance (Ohms)=1.8k, RoHS="RoHS Compliant", Size / Dimension="0.039\" L x 0.020\" W (1.00mm x 0.50mm)", Stock 1=39375, Stock 2=39375, Supplier 1=Digi-Key, Supplier 2=Digi-Key, Supplier Part Number 2=P1.8KDCDKR-ND
R13 R14 R56 R57: library part ERJ-2RKF1100X, "RES SMD 110 OHM 1% 1/10W 0402", Manufacturer="Panasonic Electronic Components", Operating Temperature="-55°C ~ 155°C", Package / Case="0402 (1005 Metric)", Power (Watts)="0.1W, 1/10W", Supplier Device Package=0402, Supplier Part Number 1=P110LCT-ND, Temperature Coefficient=±100ppm/°C, Tolerance=±1%, Category=Resistors, ComponentLink1Description=https://industrial.panasonic.com/cdbs/www-data/pdf/RDA0000/AOA0000C304.pdf, ComponentLink1URL=https://industrial.panasonic.com/cdbs/www-data/pdf/RDA0000/AOA0000C304.pdf, Composition="Thick Film", Failure Rate=-, Features="Automotive AEC-Q200", Height - Seated (Max)="0.016\" (0.40mm)", Manufacturer Part Number=ERJ-2RKF1100X, Packaging="Cut Tape (CT)", Part Status=Active, Pricing 1="1=0.1, 10=0.039, 100=0.016, 1000=0.00719, 2500=0.00624, 5000=0.00515 (USD)", Pricing 2="1=0.1, 10=0.039, 100=0.016, 1000=0.00719, 2500=0.00624, 5000=0.00515 (USD)", RoHS="RoHS Compliant", Size / Dimension="0.039\" L x 0.020\" W (1.00mm x 0.50mm)", Stock 1=171366, Stock 2=171366, Supplier 1=Digi-Key, Supplier 2=Digi-Key, Supplier Part Number 2=P110LDKR-ND
R20 R22 R26: library part ERA-2AEB512X, "RES SMD 5.1K OHM 0.1% 1/16W 0402", Manufacturer="Panasonic Electronic Components", Operating Temperature="-55°C ~ 155°C", Package / Case="0402 (1005 Metric)", Power (Watts)="0.063W, 1/16W", Resistance (Ohms)=5.1k, Supplier Device Package=0402, Supplier Part Number 1=P5.1KDCCT-ND, Temperature Coefficient=±25ppm/°C, Tolerance=±0.1%, Category=Resistors, ComponentLink1Description=https://industrial.panasonic.com/cdbs/www-data/pdf/RDA0000/AOA0000C237.pdf, ComponentLink1URL=https://industrial.panasonic.com/cdbs/www-data/pdf/RDA0000/AOA0000C237.pdf, Composition="Thin Film", Failure Rate=-, Features="Automotive AEC-Q200", Height - Seated (Max)="0.016\" (0.40mm)", Manufacturer Part Number=ERA-2AEB512X, Number of Terminations=2, Packaging="Cut Tape (CT)", Part Status=Active, Pricing 1="1=0.61, 50=0.238, 100=0.1913, 250=0.14876, 500=0.1122, 1000=0.0867, 5000=0.0646 (USD)", Pricing 2="1=0.61, 50=0.238, 100=0.1913, 250=0.14876, 500=0.1122, 1000=0.0867, 5000=0.0646 (USD)", RoHS="RoHS Compliant", Size / Dimension="0.039\" L x 0.020\" W (1.00mm x 0.50mm)", Stock 1=26098, Stock 2=26098, Supplier 1=Digi-Key, Supplier 2=Digi-Key, Supplier Part Number 2=P5.1KDCDKR-ND
R24 R25: library part ERJ-2RKF7680X, "RES SMD 768 OHM 5.0% 1/10W 0402", Manufacturer="Panasonic Electronic Components", Operating Temperature="-55°C ~ 155°C", Package / Case="0402 (1005 Metric)", Power (Watts)="0.1W, 1/10W", Supplier Device Package=0402, Supplier Part Number 1=P768LCT-ND, Temperature Coefficient=±100ppm/°C, Tolerance=±1%, Category=Resistors, ComponentLink1Description=https://industrial.panasonic.com/cdbs/www-data/pdf/RDA0000/AOA0000C304.pdf, ComponentLink1URL=https://industrial.panasonic.com/cdbs/www-data/pdf/RDA0000/AOA0000C304.pdf, Composition="Thick Film", Failure Rate=-, Features="Automotive AEC-Q200", Height - Seated (Max)="0.016\" (0.40mm)", Manufacturer Part Number=ERJ-2RKF7680X, Packaging="Cut Tape (CT)", Part Status=Active, Pricing 1="1=0.1, 10=0.039, 100=0.016, 1000=0.00719, 2500=0.00624, 5000=0.00515 (USD)", Pricing 2="1=0.1, 10=0.039, 100=0.016, 1000=0.00719, 2500=0.00624, 5000=0.00515 (USD)", RoHS="RoHS Compliant", Size / Dimension="0.039\" L x 0.020\" W (1.00mm x 0.50mm)", Stock 1=54378, Stock 2=54378, Supplier 1=Digi-Key, Supplier 2=Digi-Key, Supplier Part Number 2=P768LDKR-ND
R41 R48 R49 R54: library part ERJ-2GEJ106X, "RES SMD 10M OHM 5% 1/10W 0402", Manufacturer="Panasonic Electronic Components", Operating Temperature="-55°C ~ 155°C", Package / Case="0402 (1005 Metric)", Power (Watts)="0.1W, 1/10W", Supplier Device Package=0402, Supplier Part Number 1=P10MJCT-ND, Temperature Coefficient="-400/ +150ppm/°C", Tolerance=±5%, Category=Resistors, ComponentLink1Description=http://industrial.panasonic.com/www-cgi/jvcr13pz.cgi?E+PZ+3+AOA0001+ERJ2GEJ106X+7+WW, ComponentLink1URL=http://industrial.panasonic.com/www-cgi/jvcr13pz.cgi?E+PZ+3+AOA0001+ERJ2GEJ106X+7+WW, Composition="Thick Film", Failure Rate=-, Features="Automotive AEC-Q200", Height - Seated (Max)="0.016\" (0.40mm)", Manufacturer Part Number=ERJ-2GEJ106X, Number of Terminations=2, Packaging="Cut Tape (CT)", Part Status=Active, Pricing 1="1=0.1, 50=0.0106, 100=0.0078, 250=0.00596, 500=0.00476, 1000=0.0035, 5000=0.00251 (USD)", Pricing 2="1=0.1, 50=0.0106, 100=0.0078, 250=0.00596, 500=0.00476, 1000=0.0035, 5000=0.00251 (USD)", Resistance (Ohms)=10M, RoHS="RoHS Compliant", Size / Dimension="0.039\" L x 0.020\" W (1.00mm x 0.50mm)", Stock 1=53777, Stock 2=53777, Supplier 1=Digi-Key, Supplier 2=Digi-Key, Supplier Part Number 2=P10MJDKR-ND
R42 R107: library part CR0603-FX-3300ELF, "RES SMD 330 OHM 1% 1/10W 0603", Manufacturer="Bourns Inc.", Operating Temperature="-55°C ~ 155°C", Package / Case="0603 (1608 Metric)", Power (Watts)="0.1W, 1/10W", Resistance (Ohms)=330, Supplier Device Package=0603, Supplier Part Number 1=CR0603-FX-3300ELFCT-ND, Temperature Coefficient=±100ppm/°C, Tolerance=±1%, Category=Resistors, ComponentLink1Description=http://www.bourns.com/docs/Product-Datasheets/CHPREZTR.pdf, ComponentLink1URL=http://www.bourns.com/docs/Product-Datasheets/CHPREZTR.pdf, Composition="Thick Film", Failure Rate=-, Features="Moisture Resistant", Height - Seated (Max)="0.022\" (0.55mm)", Manufacturer Part Number=CR0603-FX-3300ELF, Packaging="Cut Tape (CT)", Part Status=Active, Pricing 1="1=0.1, 10=0.023, 100=0.0092, 1000=0.00414, 2500=0.00359 (USD)", Pricing 2="1=0.1, 10=0.023, 100=0.0092, 1000=0.00414, 2500=0.00359 (USD)", RoHS="RoHS Compliant", Size / Dimension="0.063\" L x 0.031\" W (1.60mm x 0.80mm)", Stock 1=45245, Stock 2=45245, Supplier 1=Digi-Key, Supplier 2=Digi-Key, Supplier Part Number 2=CR0603-FX-3300ELFDKR-ND
R43 R44: library part CR0603-FX-4701ELF, "RES SMD 4.7K OHM 1% 1/10W 0603", Manufacturer="Bourns Inc.", Operating Temperature="-55°C ~ 155°C", Package / Case="0603 (1608 Metric)", Power (Watts)="0.1W, 1/10W", Resistance (Ohms)=4.7k, Supplier Device Package=0603, Supplier Part Number 1=CR0603-FX-4701ELFCT-ND, Temperature Coefficient=±100ppm/°C, Tolerance=±1%, Category=Resistors, ComponentLink1Description=http://www.bourns.com/docs/Product-Datasheets/CHPREZTR.pdf, ComponentLink1URL=http://www.bourns.com/docs/Product-Datasheets/CHPREZTR.pdf, Composition="Thick Film", Failure Rate=-, Features="Moisture Resistant", Height - Seated (Max)="0.022\" (0.55mm)", Manufacturer Part Number=CR0603-FX-4701ELF, Packaging="Cut Tape (CT)", Part Status=Active, Pricing 1="1=0.1, 10=0.021, 100=0.0086, 1000=0.00385, 2500=0.00334 (USD)", Pricing 2="1=0.1, 10=0.021, 100=0.0086, 1000=0.00385, 2500=0.00334 (USD)", RoHS="RoHS Compliant", Size / Dimension="0.063\" L x 0.031\" W (1.60mm x 0.80mm)", Stock 1=43560, Stock 2=43560, Supplier 1=Digi-Key, Supplier 2=Digi-Key, Supplier Part Number 2=CR0603-FX-4701ELFDKR-ND
R45 R58 R59: library part CR0603-FX-5100ELF, "RES SMD 510 OHM 1% 1/10W 0603", Manufacturer="Bourns Inc.", Operating Temperature="-55°C ~ 155°C", Package / Case="0603 (1608 Metric)", Power (Watts)="0.1W, 1/10W", Supplier Device Package=0603, Supplier Part Number 1=CR0603-FX-5100ELFDKR-ND, Temperature Coefficient=±100ppm/°C, Tolerance=±1%, Category=Resistors, ComponentLink1Description=https://www.bourns.com/docs/Product-Datasheets/CHPREZTR.pdf, ComponentLink1URL=https://www.bourns.com/docs/Product-Datasheets/CHPREZTR.pdf, Composition="Thick Film", Failure Rate=-, Features="Moisture Resistant", Height - Seated (Max)="0.022\" (0.55mm)", Manufacturer Part Number=CR0603-FX-5100ELF, Packaging=Digi-Reel®, Part Status=Active, Pricing 1="1=0.1, 10=0.021, 100=0.0086, 1000=0.00385, 2500=0.00334 (USD)", RoHS="RoHS Compliant", Size / Dimension="0.063\" L x 0.032\" W (1.60mm x 0.80mm)", Stock 1=523, Supplier 1=Digi-Key
R46: library part ERJ-3EKF28R0V, "RES SMD 28 OHM 1% 1/10W 0603", Manufacturer="Panasonic Electronic Components", Operating Temperature="-55°C ~ 155°C", Package / Case="0603 (1608 Metric)", Power (Watts)="0.1W, 1/10W", Resistance (Ohms)=28, Supplier Device Package=0603, Supplier Part Number 1=P28.0HCT-ND, Temperature Coefficient=±100ppm/°C, Tolerance=±1%, Category=Resistors, ComponentLink1Description=http://industrial.panasonic.com/www-cgi/jvcr13pz.cgi?E+PZ+3+AOA0002+ERJ3EKF28R0V+7+WW, ComponentLink1URL=http://industrial.panasonic.com/www-cgi/jvcr13pz.cgi?E+PZ+3+AOA0002+ERJ3EKF28R0V+7+WW, Composition="Thick Film", Failure Rate=-, Features="Automotive AEC-Q200", Height - Seated (Max)="0.022\" (0.55mm)", Manufacturer Part Number=ERJ-3EKF28R0V, Number of Terminations=2, Packaging="Cut Tape (CT)", Part Status=Active, Pricing 1="1=0.1, 10=0.019, 25=0.0136, 50=0.0104, 100=0.0077, 250=0.00584, 500=0.00468, 1000=0.00345 (USD)", Pricing 2="1=0.1, 10=0.019, 25=0.0136, 50=0.0104, 100=0.0077, 250=0.00584, 500=0.00468, 1000=0.00345 (USD)", RoHS="RoHS Compliant", Size / Dimension="0.063\" L x 0.031\" W (1.60mm x 0.80mm)", Stock 1=22288, Stock 2=22288, Supplier 1=Digi-Key, Supplier 2=Digi-Key, Supplier Part Number 2=P28.0HDKR-ND
R47: library part "RES999G 0603", "RES SMD 999G OHM 5% 1/10W 0603", Manufacturer Part Number="Do Not Place", Supplier Device Package=0603